# Altium PCB Verison_1.1.PcbDoc
Units mm, origin at the board's own origin, x right, y up, seen from the top; angles counter-clockwise.
Board outline 65.29 x 40.57 mm, 2 copper layers (Top Layer, Bottom Layer); 94 components, 92 nets, 465 pads, 128 vias.
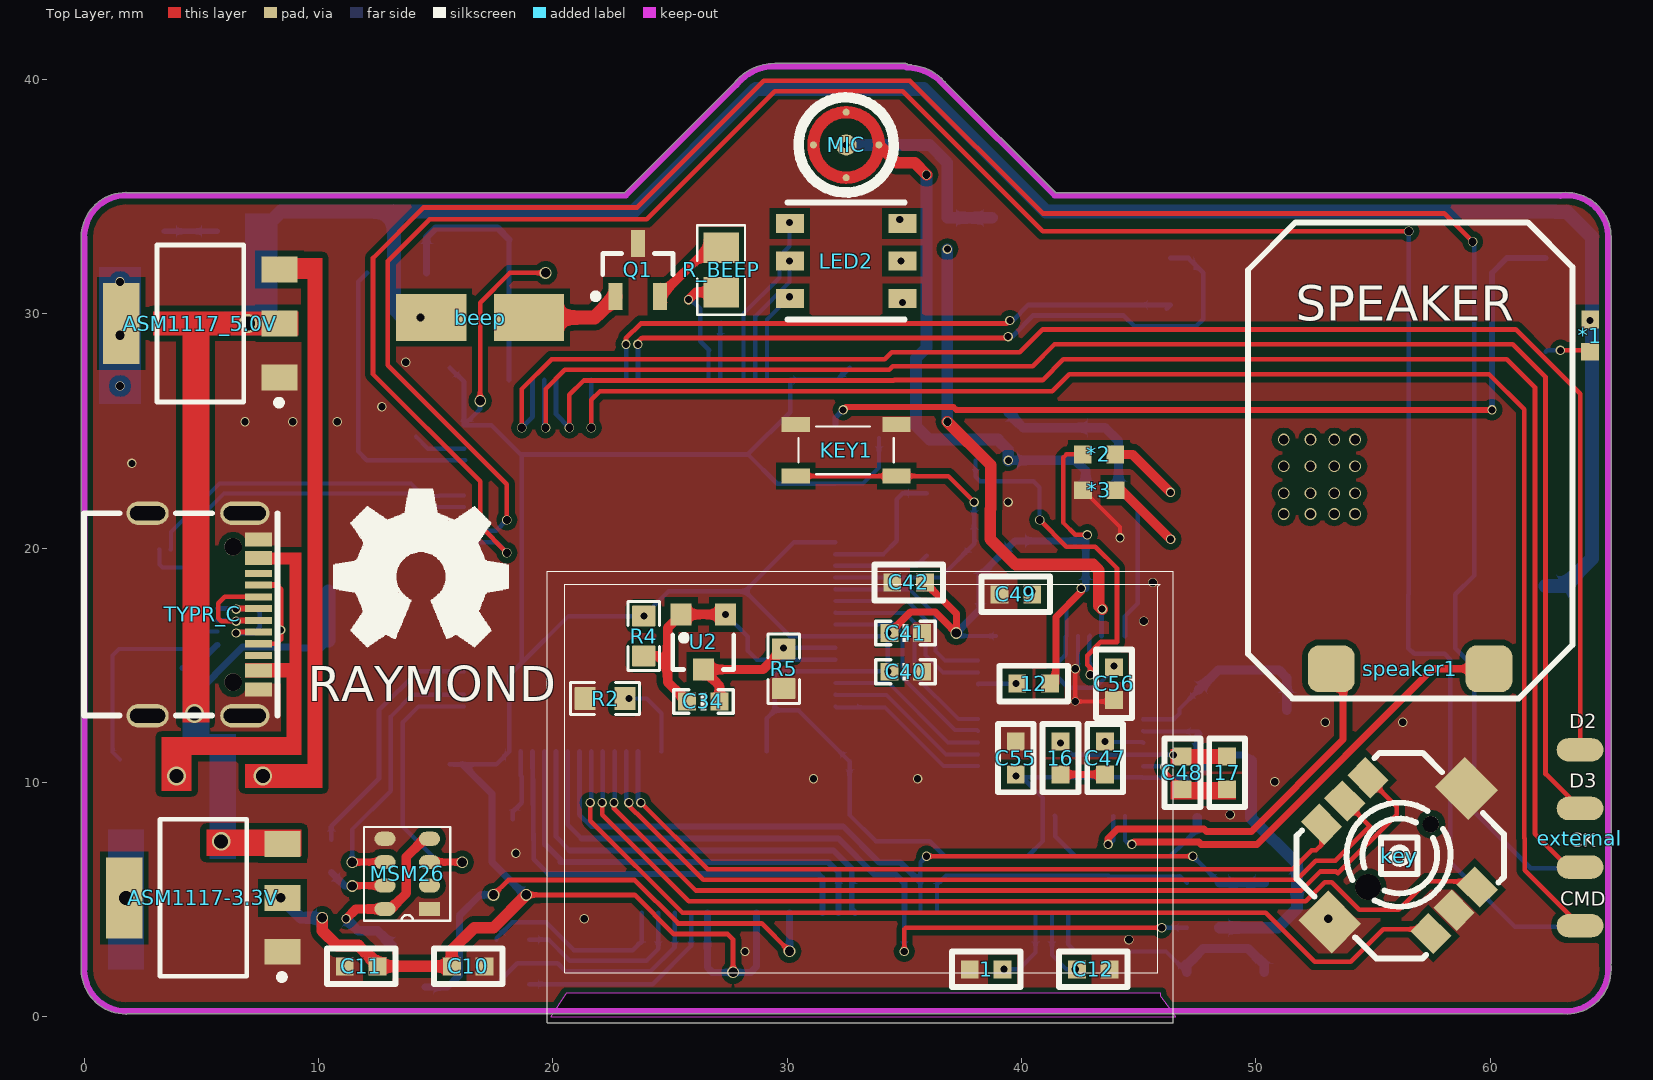
[diagram p0: Top Layer view]
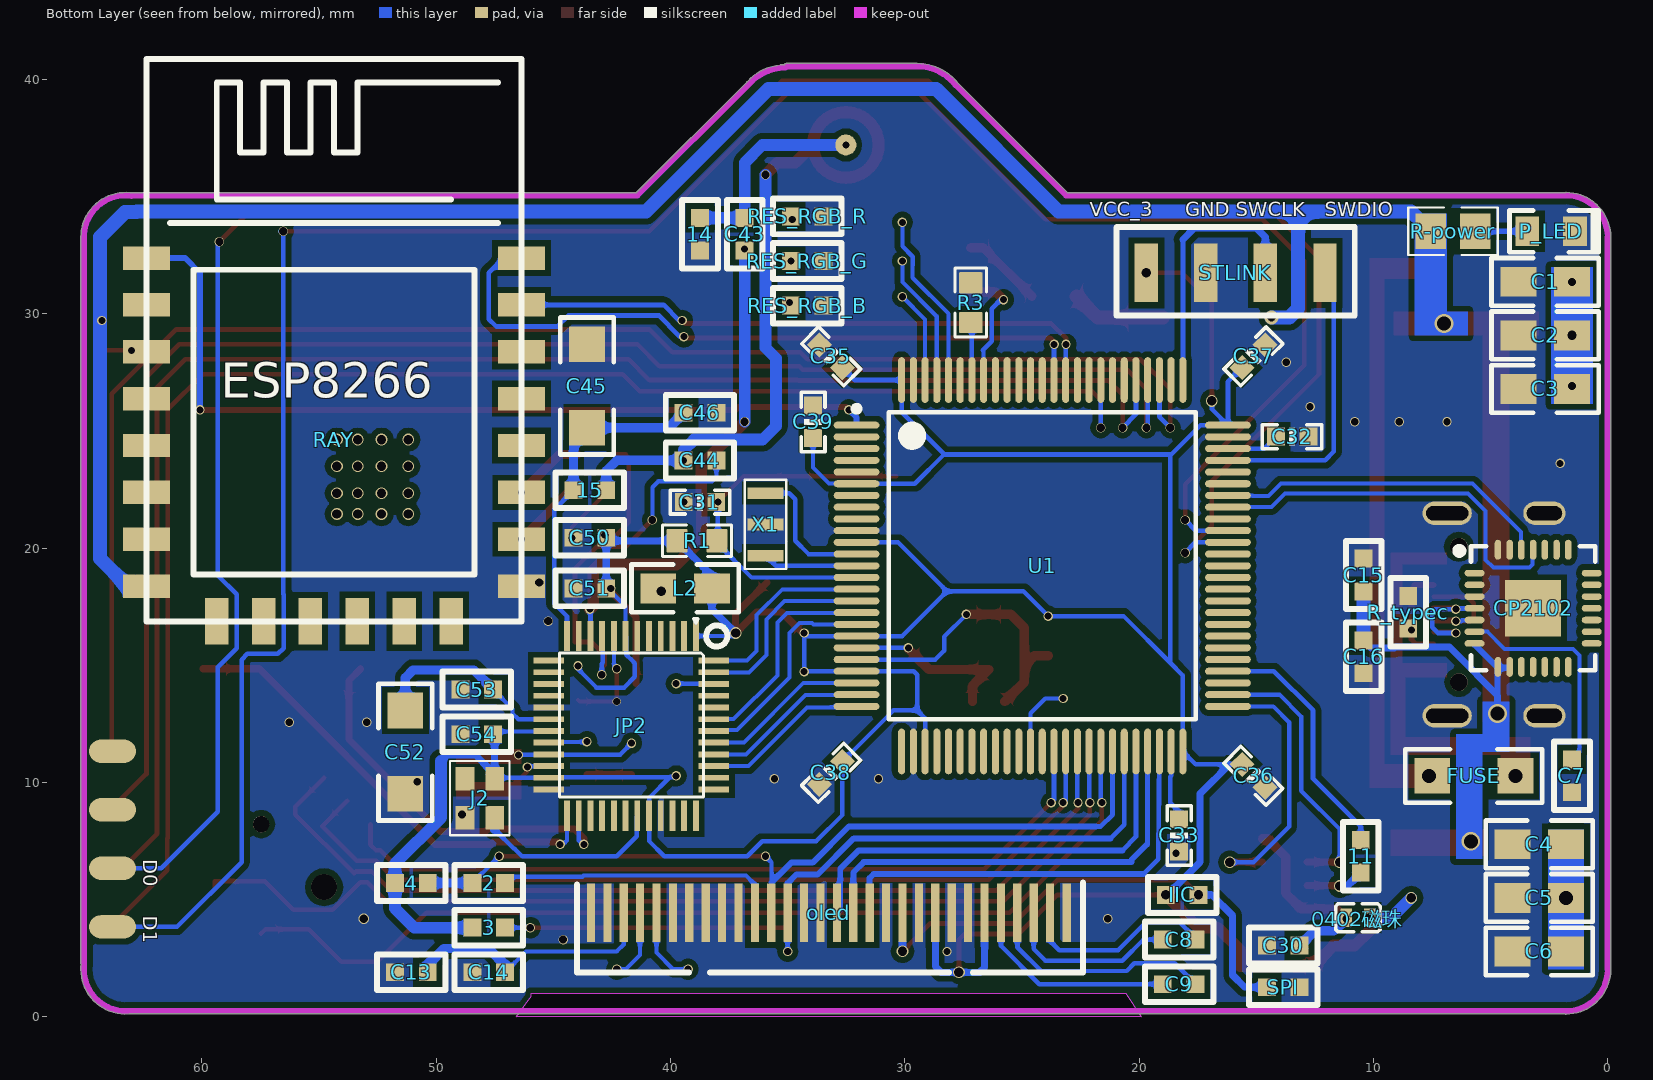
[diagram p1: Bottom Layer view, seen from below]

## Layer stack, top to bottom
Top Solder: solder mask 0.0102, Solder Resist, Dk 3.5
Top Layer: signal copper 0.0356
Dielectric 1: dielectric 0.32, FR-4, Dk 4.8
Bottom Layer: signal copper 0.0356
Bottom Solder: solder mask 0.0102, Solder Resist, Dk 3.5

## Board outline
-0.132,2.032 cw(c-0.005,2.032) -0.127,2.066 -0.127,33.24 cw(c-0.005,33.274) -0.132,33.274 cw(c1.778,33.274) 1.778,35.184 cw(c1.778,35.057) 1.812,35.179 23.061,35.179 27.717,39.835 cw(c29.464,38.481) 29.464,40.691 35.032,40.691 cw(c35.032,40.564) 35.138,40.635 cw(c35.088,38.425) 36.732,39.902 41.455,35.179 62.994,35.179 cw(c62.994,35.052) 63.036,35.172 cw(c63.246,33.274) 65.156,33.274 cw(c63.246,33.274) 65.151,33.143 65.151,2.284 cw(c65.024,2.284) 65.144,2.242 cw(c63.246,2.032) 65.156,2.032 cw(c63.246,2.032) 63.115,0.127 1.812,0.127 cw(c1.778,0.249) 1.778,0.122 cw(c1.778,2.032)

## Design rules (kind name [scope] priority, off if disabled: settings)
Clearance [All] p1: gap=0.254
PlaneConnect [All] p1: planeconnectstyle=Direct reliefexpansion=0.508 reliefentries=4 reliefconductorwidth=0.254 reliefairgap=0.254
PolygonConnect [All] p1: connectstyle=Direct reliefconductorwidth=0.254 reliefentries=4 polygonreliefangle="90 Angle" airgapwidth=0.254
RoutingVias [All] p1: holewidth=0.711 width=1.27 viastyle="Through Hole" minholewidth=0.711 minwidth=1.27 maxholewidth=0.711 maxwidth=1.27
SolderMaskExpansion [All] p1: expansion=0.102
Width [All] p1: maxlimit=2 minlimit=0.17 preferedwidth=0.18 minimp=50.000000 maximp=50.000000 favimp=50.000000
29 further rules are at their usual default settings.

## Components (designator, comment, footprint, x,y, rotation, side; value= is the part's Value field where it differs from the comment)
1 "电阻0603" 0603#1 38.481,2.032 r180 top
2 "电阻0603" 0603#1 47.752,5.715 r0 bottom
3 "电阻0603" 0603#1 47.752,3.81 r0 bottom
4 "电阻0603" 0603#1 51.054,5.715 r0 bottom
11 "电阻0603" 0603#1 10.541,6.858 r270 bottom
12 "电阻0603" 0603#1 40.513,14.224 r180 top
14 "电阻0603" 0603#1 38.735,33.401 r90 bottom
15 "电阻0603" 0603#1 43.434,22.479 r0 bottom
16 "电阻0603" 0603#1 41.656,11.049 r270 top
17 "电阻0603" 0603#1 48.768,10.414 r270 top
0402磁珠 "0402磁珠" 0402磁珠 10.668,4.191 r180 bottom
*1 "RES-0603" 0603#2 64.262,29.083 r270 top
*2 "RES-0603" 0603#2 43.307,24.003 r180 top
*3 "RES-0603" 0603#2 43.307,22.479 r0 top
ASM1117-3.3V "ASM1117-3.3V" SOT-223 5.08,5.08 r90 top locked
ASM1117_5.0V "ASM1117-5.0V" SOT-223 4.953,29.591 r90 top locked
beep "蜂鸣器" 两脚蜂鸣器 16.891,29.845 r0 top
C1 "Cap" 0805 1.524,31.369 r0 bottom locked
C2 "Cap" 0805 1.524,29.083 r0 bottom
C3 "Cap" 0805 1.524,26.797 r0 bottom locked
C4 "Cap" 0805 1.778,7.366 r0 bottom
C5 "Cap" 0805 1.778,5.08 r0 bottom
C6 "Cap" 0805 1.778,2.794 r0 bottom
C7 "104" 0603#1 1.524,10.287 r90 bottom
C8 "104" 0603#1 18.288,3.302 r0 bottom
C9 "104" 0603#1 18.288,1.397 r0 bottom
C10 "104" 0603#1 16.383,2.159 r0 top
C11 "104" 0603#1 11.811,2.159 r180 top
C12 "2.2uf" 0603#1 43.053,2.032 r0 top
C13 "2.2uf" 0603#1 51.054,1.905 r0 bottom
C14 "1uf" 0603#1 47.752,1.905 r0 bottom
C15 "1uf" 0603#1 10.414,18.86 r90 bottom
C16 "0.1uf" 0603#1 10.414,15.367 r270 bottom
C30 "100nf" 0603#1 13.843,3.048 r0 bottom locked
C31 "CAP_22" 0603_C 38.735,21.971 r180 bottom
C32 "Cap" 0603_C 13.462,24.765 r180 bottom
C33 "Cap" 0603_C 18.288,7.747 r90 bottom
C34 "Cap" 0603_C 26.416,13.462 r180 top
C35 "104" 0603_C 33.147,28.194 r45 bottom
C36 "104" 0603_C 15.113,10.287 r225 bottom
C37 "104" 0603_C 15.113,28.194 r135 bottom
C38 "104" 0603_C 33.147,10.414 r315 bottom
C39 "104" 0603_C 33.909,25.4 r90 bottom
C40 "104" 0603_C 35.052,14.732 r0 top
C41 "104" 0603_C 35.052,16.383 r0 top
C42 "104" 0603#1 35.179,18.542 r0 top
C43 "103" 0603#1 36.83,33.401 r270 bottom
C44 "103" 0603#1 38.735,23.749 r180 bottom
C45 "10uf" 1206 43.561,26.924 r90 bottom
C46 "104" 0603#1 38.735,25.781 r180 bottom
C47 "0.1uf" 0603#1 43.561,11.049 r90 top
C48 "220pf" 0603#1 46.863,10.414 r270 top
C49 "103" 0603#1 39.751,18.034 r180 top
C50 "104" 0603#1 43.434,20.447 r0 bottom
C51 "104" 0603#1 43.434,18.288 r0 bottom
C52 "10UF" 1206 51.308,11.303 r270 bottom locked
C53 "104" 0603#1 48.26,13.97 r0 bottom
C54 "104" 0603#1 48.26,12.065 r180 bottom
C55 "104" 0603#1 39.751,11.049 r270 top
C56 "104" 0603#1 43.942,14.224 r90 top
CP2102 "CP2102" CP2102 3.183,17.439 r180 bottom
external "双层边缘外接贴片" 外接贴片接口(无外框) 63.5,7.62 r90 top locked
FUSE "500MA" 1206 5.715,10.287 r0 bottom
IIC "电阻0603" 0603#1 18.161,5.207 r180 bottom
J2 "oscillator" J有源晶振-正方 58.293,8.382 r270 bottom
JP2 "LD3320" QFN48 38.91,15.977 r270 bottom locked
key "五向按键" 五向按键 56.134,6.985 r315 top locked
KEY1 "按键" 四角按键 32.512,24.182 r0 top
L2 "47uh" 0805 38.227,18.288 r0 bottom
LED2 "3LED" 三色LED 32.512,32.258 r0 top
MIC "MIC" 贴片MIC头 32.512,37.211 r0 top (schematic designator mic)
MSM26 "MSM261S4030H0" "MSM261S4030H0 - duplicate" 14.732,4.604 r180 top
oled "OLED_plast" oled_plast 32.512,10.541 r180 bottom locked
P_LED "LED0" 0805LED 2.413,33.528 r180 bottom
Q1 "QNPN" SOT-23B_N 23.622,31.877 r90 top
R1 "RES_10K" 0603_R 38.862,20.32 r0 bottom
R2 "Res2" 0603_R 22.225,13.589 r0 top
R3 "Res2" 0603_R 27.178,30.48 r90 bottom
R4 "Res2" 0603_R 23.876,16.256 r270 top
R5 "Res2" 0603_R 29.845,14.859 r90 top
R-power "Res1" 0805-1 6.604,33.528 r180 bottom
R_BEEP "Res1" 0805-1 27.178,31.877 r270 top
R_typec "电阻0603" 0603#1 8.509,17.272 r90 bottom
RAY "ESP8266" esp8266 54.34,28.711 r180 bottom locked
RES_RGB_B "电阻0603" 0603#1 34.163,30.353 r0 bottom
RES_RGB_G "电阻0603" 0603#1 34.163,32.258 r0 bottom
RES_RGB_R "电阻0603" 0603#1 34.163,34.163 r0 bottom
speaker1 "20*13mm  喇叭" "20*13mm 喇叭" 49.657,13.589 r0 top locked
SPI "电阻0603" 0603#1 13.843,1.27 r180 bottom
STLINK "贴片蓝牙" 贴片蓝牙 15.875,31.75 r180 bottom
TYPR_C "type-c" type-c 4.046,17.303 r270 top locked
U1 "STM32_F407" LQFP_100 24.13,19.304 r180 bottom locked
U2 "TL431A" SOT_23 26.416,16.002 r180 top
X1 "XTAL_SMT" XTAL_SMD 35.941,21.018 r90 bottom

## Footprints (in the part's own frame and the unit in brackets; to place one, negate y for a bottom-side part, rotate by r counter-clockwise, add the part's x,y. Pads: shape width x height; smd on the part's side, far side on the other; paste and mask are expansions set on the pad)
"20*13mm 喇叭" [mm]
  rrect50% 2x2 smd: 1(3.556,1.27) 2(10.287,1.27)
  silkscreen extent 0,0 13.84,20.32
0402磁珠 [mm]
  rect 0.5x0.8 smd: 1(-0.491,0.04) 2(0.509,0.04)
  silkscreen extent -0.94,-0.56 0.96,0.64
0603#1 [mil]
  rect 30x30 smd: 1(-27.5,0) 2(27.5,0)
  silkscreen extent -58,-30 58,30
0603#2 [mil]
  rect 30x30 smd: 1(-27,0) 2(27.5,-0.06)
0603_C [mil]
  rect 30x30 smd: 1(-27.25,0.03) 2(27.25,-0.03)
  silkscreen extent -50,-20 50,20, body extent -33,-18 33,18, height 35
0603_R [mm]
  rrect10% 0.9x1 smd: 1(-0.85,0) 2(0.85,0)
  silkscreen extent -1.47,-0.67 1.47,0.67, body extent -0.85,-0.38 0.85,0.42, height 0.56
0805 [mil]
  rect 60x50 smd: 1(0,0) 2(90,0)
  silkscreen extent -45,-40 135,40
0805-1 [mm]
  rect 1.3x1.5 smd: 1(-0.95,0) 2(0.95,0)
  silkscreen extent -1.9,-1.02 1.91,1.02, body extent -1,-0.62 1,0.63, height 0.5
0805LED [mil]
  rect 40x50 smd: 1(-40,0) 2(40,0)
  silkscreen extent -70,-35 80,35
1206 [mil]
  rect 60x60 smd: 1(-70,0) 2(70,0)
  silkscreen extent -115,-45 115,45, body extent -75,-35 75,35, height 39
CP2102 [mm]
  oval 0.85x0.28 smd: 1(-2.5,1.501) 2(-2.5,1.001) 3(-2.5,0.5) 4(-2.5,0) 5(-2.5,-0.5) 6(-2.5,-1.001) 7(-2.5,-1.501) 15(2.5,-1.501) 16(2.5,-1.001) 17(2.5,-0.5) 18(2.5,0) 19(2.5,0.5) 20(2.5,1.001) 21(2.5,1.501)
  oval 0.28x0.85 smd: 8(-1.501,-2.5) 9(-1.001,-2.5) 10(-0.5,-2.5) 11(0,-2.5) 12(0.5,-2.5) 13(1.001,-2.5) 14(1.501,-2.5) 22(1.501,2.5) 23(1.001,2.5) 24(0.5,2.5) 25(0,2.5) 26(-0.5,2.5) 27(-1.001,2.5) 28(-1.501,2.5)
  rect 2.4x2.4 smd: 29(0,0)
  silkscreen extent -3.3,-2.65 2.65,2.65
esp8266 [mm]
  rect 2x1 smd: 1(-8.017,3.674) 2(-8.017,1.674) 3(-8.017,-0.326) 4(-8.017,-2.326) 5(-8.017,-4.326) 6(-8.017,-6.326) 7(-8.017,-8.326) 8(-8.016,-10.326) 9(7.983,-10.326) 10(7.985,-8.326) 11(7.986,-6.326) 12(7.985,-4.326) 13(7.984,-2.326) 14(7.985,-0.326) 15(7.985,1.674) 16(7.985,3.674)
  rect 1x2 smd: 17(-5.015,-11.827) 18(-3.017,-11.826) 19(-1.019,-11.826) 20(0.982,-11.826) 21(2.981,-11.826) 22(4.981,-11.827)
  silkscreen extent -8.02,-11.83 7.98,12.17
J有源晶振-正方 [mm]
  rect 1x0.8 smd: 1(-1.778,9.525) 2(-0.127,9.525) 3(-0.127,10.795) 4(-1.778,10.795)
  silkscreen extent -2.54,8.89 0.64,11.43
LQFP_100 [mm]
  oval 1.95x0.3 smd: 1(-7.925,5.949) 2(-7.925,5.449) 3(-7.925,4.949) 4(-7.925,4.449) 5(-7.925,3.949) 6(-7.925,3.449) 7(-7.925,2.949) 8(-7.925,2.449) 9(-7.925,1.949) 10(-7.925,1.449) 11(-7.925,0.949) 12(-7.925,0.449) 13(-7.925,-0.051) 14(-7.925,-0.551) 15(-7.925,-1.051) 16(-7.925,-1.551) 17(-7.925,-2.051) 18(-7.925,-2.551) 19(-7.925,-3.051) 20(-7.925,-3.551) 21(-7.925,-4.051) 22(-7.925,-4.551) 23(-7.925,-5.051) 24(-7.925,-5.551) 25(-7.925,-6.051) 51(7.925,-6.051) 52(7.925,-5.551) 53(7.925,-5.051) 54(7.925,-4.551) 55(7.925,-4.051) 56(7.925,-3.551) 57(7.925,-3.051) 58(7.925,-2.551) 59(7.925,-2.051) 60(7.925,-1.551) 61(7.925,-1.051) 62(7.925,-0.551) 63(7.925,-0.051) 64(7.925,0.449) 65(7.925,0.949) 66(7.925,1.449) 67(7.925,1.949) 68(7.925,2.449) 69(7.925,2.949) 70(7.925,3.449) 71(7.925,3.949) 72(7.925,4.449) 73(7.925,4.949) 74(7.925,5.449) 75(7.925,5.949)
  oval 0.3x1.95 smd: 26(-6,-7.976) 27(-5.5,-7.976) 28(-5,-7.976) 29(-4.5,-7.976) 30(-4,-7.976) 31(-3.5,-7.976) 32(-3,-7.976) 33(-2.5,-7.976) 34(-2,-7.976) 35(-1.5,-7.976) 36(-1,-7.976) 37(-0.5,-7.976) 38(0,-7.976) 39(0.5,-7.976) 40(1,-7.976) 41(1.5,-7.976) 42(2,-7.976) 43(2.5,-7.976) 44(3,-7.976) 45(3.5,-7.976) 46(4,-7.976) 47(4.5,-7.976) 48(5,-7.976) 49(5.5,-7.976) 50(6,-7.976) 76(6,7.874) 77(5.5,7.874) 78(5,7.874) 79(4.5,7.874) 80(4,7.874) 81(3.5,7.874) 82(3,7.874) 83(2.5,7.874) 84(2,7.874) 85(1.5,7.874) 86(1,7.874) 87(0.5,7.874) 88(0,7.874) 89(-0.5,7.874) 90(-1,7.874) 91(-1.5,7.874) 92(-2,7.874) 93(-2.5,7.874) 94(-3,7.874) 95(-3.5,7.874) 96(-4,7.874) 97(-4.5,7.874) 98(-5,7.874) 99(-5.5,7.874) 100(-6,7.874)
  silkscreen extent -8.05,-6.6 6.55,6.77, body extent -8,-8 8,8, height 1.6
"MSM261S4030H0 - duplicate" [mm]
  rect 0.9x0.6 smd: 1(0,0)
  oval 0.9x0.6 smd: 2(0,-1) 3(0,-2) 4(0,-3) 5(1.9,-3) 6(1.9,-2) 7(1.9,-1) 8(1.9,0)
  silkscreen extent -0.89,-3.5 2.79,0.5
oled_plast [mil]
  rect 13.8x98.4 smd: 1(371.03,-239.92) 2(343.27,-240) 3(315.71,-240) 4(288.15,-240) 5(260.59,-240) 6(233.03,-240) 7(205.47,-240) 8(177.92,-240) 9(150.36,-240) 10(122.8,-240) 11(95.24,-240) 12(67.68,-240) 13(40.12,-240) 14(12.56,-240) 15(-15,-240) 16(-42.56,-240) 17(-70.12,-240) 18(-97.67,-240) 19(-125.23,-240) 20(-152.79,-240) 21(-180.35,-240) 22(-207.91,-240) 23(-235.47,-240) 24(-263.03,-240) 25(-290.59,-240) 26(-318.15,-240) 27(-345.71,-240) 28(-373.07,-240.06) 29(-400.59,-240.1) 30(-428.11,-240.1)
  Keep-Out Layer board cut-out: 496.46,-415.01 -25,-415.01 -553.54,-415.01 -528.54,-380 -528.54,-375 -513.53,-375 -25,-375 470,-374.95
  silkscreen extent -452,-340 399,-189
QFN48 [mm]
  rect 1.3x0.25 smd: 1(-0.279,0) 2(-0.279,-0.5) 3(-0.279,-1) 4(-0.279,-1.5) 5(-0.279,-2) 6(-0.279,-2.5) 7(-0.279,-3) 8(-0.279,-3.5) 9(-0.279,-4) 10(-0.279,-4.5) 11(-0.279,-5) 12(-0.279,-5.5) 25(7.396,-5.5) 26(7.396,-5) 27(7.396,-4.5) 28(7.396,-4) 29(7.396,-3.5) 30(7.396,-3) 31(7.396,-2.5) 32(7.396,-2) 33(7.396,-1.5) 34(7.396,-1) 35(7.396,-0.5) 36(7.396,0)
  rect 0.25x1.3 smd: 13(0.77,-6.27) 14(1.27,-6.27) 15(1.77,-6.27) 16(2.27,-6.27) 17(2.77,-6.27) 18(3.27,-6.27) 19(3.77,-6.27) 20(4.27,-6.27) 21(4.77,-6.27) 22(5.27,-6.27) 23(5.77,-6.27) 24(6.27,-6.27) 37(6.27,0.77) 38(5.77,0.77) 39(5.27,0.77) 40(4.77,0.77) 41(4.27,0.77) 42(3.77,0.77) 43(3.27,0.77) 44(2.77,0.77) 45(2.27,0.77) 46(1.77,0.77) 47(1.27,0.77) 48(0.77,0.77)
  silkscreen extent -1.03,-5.82 6.59,1.34
SOT-23B_N [mm] "SOT23, 3-Leads, Body 2.9x1.3mm, Pitch 0.95mm, Lead Span 2.4mm, IPC Medium Density"
  rect 1.15x0.6 smd: 1(-1.125,0.95) 2(-1.125,-0.95) 3(1.125,0)
  silkscreen extent -1.25,-1.5 0.7,1.92, body extent -0.7,-1.5 0.7,1.5, height 1.14
SOT-223 [mm]
  rect 1.1x1.55 smd: 1(-2.3,-3.375) 2(0,-3.375) 3(2.3,-3.375)
  rect 3.45x1.55 smd: 4(0,3.375)
  silkscreen extent -3.5,-3.48 3.35,1.85, body extent -3.3,-3.94 3.3,3.43, height 0.8
SOT_23 [mm]
  rect 0.9x0.95 smd: 1(0.95,-1.175) 2(-0.95,-1.175) 3(0,1.175)
  silkscreen extent -1.3,-0.3 1.3,1.18, body extent -1.5,-1.33 1.5,1.18, height 1.12
type-c [mm]
  oval 1x2.1 hole 0.61 slot 1.8 at 90 deg: 1(-4.193,2.803) 2(4.447,2.803)
  oval 1x1.8 hole 0.61 slot 1.5 at 90 deg: 3(-4.193,-1.346) 4(4.447,-1.346)
  rect 0.6x1.15 smd: A1B12(-3.073,3.379) A4B9(-2.273,3.379) B1A12(3.327,3.379) B4A9(2.527,3.379)
  rect 0.3x1.15 smd: A5(-1.123,3.379) A6(-0.123,3.379) A7(0.377,3.379) A8(-1.623,3.379) B5(1.877,3.379) B6(0.877,3.379) B7(-0.623,3.379) B8(1.377,3.379)
  round 0.75 hole 0.75 unplated: ""(-2.763,2.304) ""(3.017,2.304)
  silkscreen extent -4.19,-4.06 4.45,4.19
XTAL_SMD [mil]
  rect 19.68x60 smd: 0(0,0) 1(-52.5,0) 2(52.5,0)
  silkscreen extent -75,-35 75,35, body extent -81,-30 81,29, height 35
三色LED [mm]
  rect 1.2x0.8 smd: 1(-2.4,1.6) 2(-2.4,0) 3(-2.4,-1.6) 4(2.4,1.6) 5(2.4,0) 6(2.4,-1.6)
  silkscreen extent -2.5,-2.5 2.5,2.5
两脚蜂鸣器 [mm]
  rect 3x2 smd: 0(-2.083,0) 1(2.083,0)
五向按键 [mm]
  rect 1.4x1.1 smd: 1(-3.237,1.32) 2(-3.237,-0.08) 3(-3.237,-1.48) 4(3.363,1.32) 5(3.363,-0.08) 6(3.363,-1.48)
  rect 2x1.8 smd: 7(0.063,3.97) 8(-0.037,-4.18)
  round 0.7 hole 0.7 unplated: ""(0.063,1.82)
  round 1.1 hole 1.1 unplated: ""(0.063,-1.98)
  silkscreen extent -3.64,-3.88 3.86,3.72
四角按键 [mm]
  rect 1.2x0.65 smd: 1(-2.15,1.1) 1(2.15,1.1) 2(-2.15,-1.1) 2(2.15,-1.1)
  silkscreen extent -2.03,-1.02 2.03,1.02
外接贴片接口(无外框) [mm]
  oval 1x2 smd: 1(-3.723,-0.331) 2(-1.223,-0.331) 3(1.277,-0.331) 4(3.777,-0.331)
  oval 1x2 smd far side: 5(3.723,-0.304) 6(1.223,-0.304) 7(-1.277,-0.304) 8(-3.777,-0.304)
贴片MIC头 [mm]
  round 0.9 hole 0.3: 1(0,0)
  round 0.3 smd: 2(-1.397,0) 2(0,-1.397) 2(0,1.397) 2(1.397,0)
  round 0 smd: 2(0,-1.397) 2(0,1.397)
  Top Layer region: 232 vertices and 0 holes, not listed, extent -1.647,-1.647 1.647,0.25
  Top Layer region: 232 vertices and 0 holes, not listed, extent -1.647,-0.25 1.647,1.647
  silkscreen extent -2.03,-2.03 2.03,2.03
贴片蓝牙 [mm]
  rect 1x2.5 smd: 1(-3.81,0) 2(-1.27,0) 3(1.27,0) 4(3.81,0)
  silkscreen extent -5.08,-1.82 5.08,1.97

## Part data
ASM1117-3.3V ASM1117_5.0V: library part ASM1117, "3.3V稳压芯片"
C1 C2 C3 C4 C5 C6: "无极性电容"
C7 C8 C9 C10 C11 C12 C13 C14 C15 C16 C30 C42 C43 C44 C46 C47 C48 C49 C50 C51 C53 C54 C55 C56: library part 电容0603
C32 C33 C34: "Capacitor"
C35 C36 C37 C38 C39 C40 C41: library part CAP, "Capacitor"
C45 C52: library part "Cap Pol2", "电解电容"
FUSE: library part Fuse, "Fuse"
J2: library part "J晶振 有源"
L2: library part L
LED2: library part 三色LED
P_LED: "发光二极管"
Q1: "NPN Bipolar Transistor"
R2 R3 R4 R5: "Resistor"
R-power R_BEEP: "贴片电阻"
RAY: library part esp8266
U1: library part STM32_F40X

## Via types
v1: diameter 0.4, hole 0.3, Top Layer to Bottom Layer, 50 vias
v2: diameter 0.5, hole 0.4, Top Layer to Bottom Layer, 30 vias
v3: diameter 0.4, hole 0.31, Top Layer to Bottom Layer, 21 vias
v4: diameter 0.4, hole 0.35, Top Layer to Bottom Layer, 16 vias
v5: diameter 0.8, hole 0.6, Top Layer to Bottom Layer, 6 vias
v6: diameter 0.4, hole 0.32, Top Layer to Bottom Layer, 1 vias
v7: diameter 0.45, hole 0.35, Top Layer to Bottom Layer, 1 vias
v8: diameter 0.35, hole 0.31, Top Layer to Bottom Layer, 1 vias
v9: diameter 0.6, hole 0.342, Top Layer to Bottom Layer, 1 vias
v10: diameter 0.4, hole 0.33, Top Layer to Bottom Layer, 1 vias

## Nets (pads, with @x,y where several pads share a name; then routed paths per layer and width w, separated by ;. In a path a pad name is that pad's centre, name@x,y a point inside that pad or via, vN(x,y) a via of type N, cw(c..) or ccw(c..) an arc to the next point about the centre after c; other vN are vias at no path point)
5V: *1.1 ASM1117-3.3V.3 ASM1117_5.0V.2 beep.0 C15.1 C16.1 CP2102.7 CP2102.8 CP2102.9 R-power.1 RAY.8 | length 97
  Bottom Layer w0.254: CP2102.9@4.196,14.899 CP2102.8@4.676,14.899 ; 4.699,13.716 4.699,14.876 CP2102.8@4.676,14.899 ; CP2102.7@5.675,15.877 4.697,14.899 CP2102.8@4.676,14.899 ; R-power.1@6.985,32.959 R-power.1
  Bottom Layer w0.3: v5(4.699,12.954) 4.699,13.716 5.571,14.588 5.571,14.609 6.751,15.789 9.057,15.789 9.098,15.748 10.096,15.748 C16.1
  Bottom Layer w0.6: R-power.1 8.397,34.371 13.208,34.371 ; C16.1 C15.1 ; v9(14.351,29.845) 13.589,29.845 13.208,30.226 13.208,34.371 ; RAY.8 63.17,18.385 64.343,19.558 64.343,32.916 64.338,32.921 64.338,33.274 63.271,34.341 62.784,34.341 62.754,34.371 41.039,34.371 35.815,39.595 28.655,39.595 23.431,34.371 13.208,34.371
  other v1: 64.262,29.718
  other v5: 5.842,7.493 6.985,29.591
AGND: C34.1 R5.2 U1.20 U2.3 | length 7.7
  Top Layer w0.4: C34.1 27.108,14.135 U2.3 28.963,14.827 R5.2
  Bottom Layer w0.19: v1(29.845,15.752) U1.20 U1.20
BEEP: R_BEEP.2 U1.93 | length 5.4
  Top Layer w0.4: v1(25.781,30.607) 26.101,30.927 R_BEEP.2
  Bottom Layer w0.18: U1.93 26.636,27.184 26.636,28.414 26.67,28.448
  Bottom Layer w0.2: v1(25.781,30.607) 25.908,30.607 26.289,30.226 26.289,28.829 26.67,28.448
BOOT0: R3.1 U1.94 | length 2.5
  Bottom Layer w0.19: U1.94 U1.94 27.13,29.582 R3.1
BOOT1: R2.2 U1.37 | length 3.3
  Bottom Layer w0.19: v1(23.241,13.589) 24.003,13.589 24.631,12.961 U1.37 U1.37
CC1: R_typec.1 TYPR_C.A5 TYPR_C.B8 | length 4.2
  Top Layer w0.2: TYPR_C.B8 8.189,15.926 8.381,16.118
  Top Layer w0.254: TYPR_C.A5 8.244,18.426 8.244,18.371 8.381,18.234 v1(8.381,16.51) 8.381,16.118
D+: CP2102.4 TYPR_C.A6 TYPR_C.B6 | length 5.6
  Top Layer w0.2: v1(6.477,16.383) 6.52,16.426 TYPR_C.B6
  Top Layer w0.254: v1(6.477,17.399) 6.504,17.426 TYPR_C.A6
  Bottom Layer w0.2: CP2102.4 5.689,17.433 6.443,17.433 v1(6.477,17.399) 7.366,17.399 7.493,17.272 7.493,16.637 7.239,16.383 v1(6.477,16.383)
D-: CP2102.5 TYPR_C.A7 TYPR_C.B7 | length 5.1
  Top Layer w0.2: v1(6.477,16.891) 5.842,16.891 5.715,17.018 5.715,17.653 5.988,17.926 TYPR_C.B7
  Top Layer w0.254: v1(6.477,16.891) 6.512,16.926 TYPR_C.A7
  Bottom Layer w0.2: CP2102.5 5.689,16.932 6.213,16.932 6.255,16.891 v1(6.477,16.891)
  Bottom Layer w0.254: v1@6.469,16.899 v1(6.477,16.891)
ESP8266_REST: RAY.1 U1.1 | length 36.9
  Top Layer w0.25: v1(32.385,25.908) 32.506,26.029 37.091,26.029 37.212,25.908 v1(60.071,25.908)
  Bottom Layer w0.25: U1.1@32.055,25.282 32.055,25.578 v1(32.385,25.908) ; v1(60.071,25.908) 60.071,31.75 60.706,32.385 RAY.1
GND: 1.2 14.1 *3.1 ASM1117-3.3V.1 ASM1117_5.0V.1 C1.2 C2.2 C3.2 C4.2 C5.2 C6.2 C7.1 C10.2 C11.2 C12.2 C13.2 C14.2 C15.2 C16.2 C30.2 C31.1 C32.2 C33.1 C35.2 C36.2 C37.2 C38.2 C39.2 C40.2 C41.2 C42.1 C45.2 C46.2 C49.2 C50.2 C51.2 C52.2 C53.2 C54.1 C55.1 C56.1 CP2102.3 J2.2 JP2.8 JP2.17 JP2.24 JP2.33 KEY1.1 key.5 key.7 key.8 MSM26.1 MSM26.5 oled.1 oled.7 oled.8 oled.10 oled.12 oled.16 oled.17 oled.21 oled.22 oled.23 oled.24 oled.25 oled.29 oled.30 P_LED.2 Q1.3 R2.1 R3.2 R5.1 R_typec.2 RAY.9 RES_RGB_B.1 RES_RGB_G.1 RES_RGB_R.1 SPI.2 STLINK.2 TYPR_C.1 TYPR_C.2 TYPR_C.3 TYPR_C.4 TYPR_C.A1B12 TYPR_C.B1A12 U1.10 U1.27 U1.74 U1.99 X1.0 | length 7.2
  Top Layer w0.18: v3(42.291,14.859) v8(42.291,13.462) 43.878,13.462 C56.1 ; *3.1 44.196,20.904 v1(44.196,20.447)
  Bottom Layer w0.18: v3(42.291,14.859) 42.41,14.978 JP2.8
  other v1: 18.415,6.985 39.427,21.972
  other v3: 28.194,2.794 21.336,4.191 31.115,10.16 35.56,10.16 52.959,12.573 56.261,12.573 2.032,23.622 6.858,25.4 8.89,25.4 10.795,25.4 12.7,26.035 13.716,27.94
  other v4: 44.577,3.302 48.895,8.636 45.212,16.891 45.593,18.542
  other v6: 50.8,10.033
  other v7: 53.086,4.191
ICR_CLK: J2.3 JP2.31 | length 8.3
  Bottom Layer w0.19: JP2.31 41.436,8.555 41.436,7.713 42.291,6.858 43.76,6.858 46.327,6.858 46.639,7.17 46.667,7.17 47.498,8.001
  Bottom Layer w0.4: 47.498,8.001 J2.3
ICR_CS: JP2.43 U1.17 | length 9.3
  Bottom Layer w0.17: U1.17 32.066,17.242 35.026,17.242 35.433,16.835 35.433,14.57 37.296,12.707 JP2.43
ICR_INTB: JP2.48 U1.15 | length 8.2
  Bottom Layer w0.17: U1.15 32.066,18.242 35.225,18.242 36.322,17.145 36.322,15.621 36.736,15.207 JP2.48
ICR_MD: 12.2 JP2.46 | length 1.6
  Bottom Layer w0.19: JP2.46 38.157,14.224 v1(39.751,14.224)
ICR_MICN: C43.2 JP2.10 | length 21.2
  Top Layer w0.5: v4(36.83,25.4) 38.677,23.553 38.677,21.679 38.661,21.664 38.661,20.394 39.751,19.304 43.053,19.304 43.292,19.065 43.292,17.541 v1(43.434,17.399)
  Bottom Layer w0.2: JP2.10 43.41,17.375 v1(43.434,17.399)
  Bottom Layer w0.5: v4(36.83,25.4) C43.2 v1(36.83,32.766)
ICR_MICP: C44.2 JP2.9 | length 16.4
  Top Layer w0.2: v10(40.767,21.209) 41.91,20.066 43.145,20.066 44.069,19.142 44.069,16.002 43.378,16.002 42.799,15.423 42.799,15.021 42.926,14.894 v3(42.926,14.605)
  Bottom Layer w0.18: C44.2 38.036,23.05 38.227,22.86 40.513,22.86 40.767,22.606 v10(40.767,21.209)
  Bottom Layer w0.2: JP2.9 42.889,16.235 42.889,15.111 42.926,15.074 v3(42.926,14.605)
ICR_ON: JP2.25 speaker1.2 | length 19.8
  Top Layer w0.3: v1(44.704,7.366) 44.8,7.462 47.558,7.462 47.654,7.366 50.038,7.366 57.531,14.859 speaker1.2
  Bottom Layer w0.18: JP2.25 44.41,7.533 44.577,7.366 v1(44.704,7.366)
ICR_OP: JP2.26 speaker1.1 | length 16.7
  Top Layer w0.3: v1(43.688,7.366) 43.688,7.62 44.084,8.016 47.787,8.016 47.883,7.92 49.809,7.92 53.721,11.832 53.721,14.351 speaker1.1
  Bottom Layer w0.18: v1(43.688,7.366) 43.751,7.366 43.91,7.525 JP2.26
ICR_RSTB: JP2.47 U1.16 | length 8.2
  Bottom Layer w0.17: U1.16 32.066,17.742 35.125,17.742 35.898,16.969 35.898,15.445 36.637,14.707 JP2.47
ICR_SCK: JP2.39 U1.25 | length 7.1
  Bottom Layer w0.17: U1.25 32.1,13.208 34.163,13.208 36.664,10.707 JP2.39
ICR_SI: JP2.41 U1.23 | length 7.1
  Bottom Layer w0.17: U1.23 32.066,14.242 34.328,14.242 36.864,11.707 JP2.41
ICR_SO: JP2.40 U1.24 | length 7.1
  Bottom Layer w0.17: U1.24 32.066,13.742 34.228,13.742 36.764,11.207 JP2.40
ICR_WRB: JP2.42 U1.18 | length 9.1
  Bottom Layer w0.17: U1.18 33.898,16.753 33.963,16.818 34.49,16.818 34.925,16.383 34.925,14.478 37.16,12.243 38.104,12.243 JP2.42
IRC_VCC3.3: 3.2 4.2 12.1 0402磁珠.2 *2.2 ASM1117-3.3V.2 C10.1 C11.1 C35.1 C36.1 C37.1 C38.1 C39.1 C40.1 C41.1 C42.2 C50.1 C51.1 C54.2 C55.2 C56.2 IIC.1 J2.4 JP2.1 JP2.7 JP2.19 JP2.23 JP2.32 L2.1 oled.6 oled.9 R1.2 R4.1 STLINK.1 U1.6 U1.11 U1.19 U1.22 U1.28 U1.50 U1.75 U1.100 | length 204.4
  Top Layer w0.19: v2(16.891,26.289) 16.891,30.48 18.161,31.75 v2(19.685,31.75) ; *2.2 41.912,24.005 41.783,23.876 41.783,21.082 42.291,20.574 v1(42.799,20.574)
  Top Layer w0.2: v2(18.86,5.207) 23.481,5.207 25.151,3.537 27.451,3.537 27.686,3.302 v2(27.686,1.905)
  Top Layer w0.3: C41.1 35.248,17.272 36.322,17.272 v2(37.211,16.383) 37.211,17.209 C42.2 ; 12.1@41.465,14.224 41.458,14.232 41.458,17.074 42.545,18.161 v3(42.545,18.288)
  Top Layer w0.5: v2(10.159,4.231) 10.159,3.684 10.795,3.048 11.698,3.048 12.509,2.237 C11.1 C10.1 15.684,2.857 16.637,3.81 17.462,3.81 v2(18.86,5.207)
  Bottom Layer w0.18: 28.321,24.003 29.571,22.753 U1.6 32.061,22.759 33.225,22.759 33.91,23.444 C39.1 ; v2(37.211,16.383) 37.338,16.256 JP2.1 ; JP2.32@40.894,8.597 JP2.32 ; JP2.7 41.91,17.526 42.545,18.161 v3(42.545,18.288) ; JP2.23 47.451,10.207 J2.4 ; JP2.19 45.211,12.176 47.561,12.176 C54.2
  Bottom Layer w0.19: C36.1 16.147,10.777 17.579,10.777 U1.50 18.13,14.574 18.669,15.113 ; v2(16.891,26.289) 16.891,25.943 16.205,25.257 16.21,25.252 17.377,25.252 18.627,24.003 18.669,23.961 18.669,15.113 ; U1.28 U1.28 29.131,12.748 29.464,13.081 ; U1.11 30.286,20.253 28.194,18.161 ; v1(39.751,10.287) 39.805,10.233 40.027,10.233 ; JP2.32@40.894,8.597 40.894,9.366 40.027,10.233 ; JP2.32 40.91,7.509 40.259,6.858 36.717,6.858 36.082,7.493 33.782,7.493 32.657,8.618 C38.1 30.479,13.081 29.464,13.081 ; JP2.7 41.884,16.23 41.884,15.461 41.68,15.257 41.673,15.257 41.513,15.097 41.513,14.515 41.972,14.056 43.153,14.056 43.942,14.845 v1(43.942,14.986) ; JP2.23 45.154,10.233 40.027,10.233 ; 18.669,15.113 20.662,17.106 v1(23.876,17.106) 24.931,18.161 28.194,18.161 ; 28.194,18.161 30.102,16.253 U1.19 U1.19 34.161,16.254 v1(34.29,16.383) v1(34.29,14.732) 34.27,14.752 U1.22 U1.22 29.612,14.753 29.464,14.605 29.464,13.081
  Bottom Layer w0.2: C37.1 16.205,27.103 U1.75@16.205,25.257 ; 18.627,24.003 28.321,24.003 30.13,25.812 U1.100 ; U1.100@30.134,27.178 32.132,27.178 C35.1
  Bottom Layer w0.3: 16.147,10.777 17.399,9.525 17.399,6.604 18.796,5.207 v2(18.86,5.207) ; oled.6 26.593,2.109 26.797,1.905 v2(27.686,1.905) 28.448,1.905 28.693,2.15 oled.9 ; v2(37.211,16.383) 38.227,17.399 L2.1 38.227,18.835 R1.2 42.608,20.32 C50.1 C51.1 ; J2.4 J2.4@47.498,10.361 ; C54.2 47.498,12.002 J2.4@47.498,10.361 ; 49.784,10.922 49.53,11.176 48.313,11.176 J2.4@47.498,10.361
  Bottom Layer w0.5: v2(8.382,5.08) 9.231,4.231 v2(10.159,4.231) ; 3.2 50.927,3.81 51.752,4.635 4.2 51.752,6.54 49.784,8.509 49.784,10.922
KEY1: key.1 U1.41 | length 40.8
  Top Layer w0.2: v1(22.606,9.144) 22.606,8.89 26.1,5.396 51.936,5.396 52.747,6.207 53.416,6.207 53.497,6.126 56.007,8.636 56.007,8.978 key.1
  Bottom Layer w0.2: v1(22.606,9.144) 22.63,9.168 U1.41
KEY2: key.2 U1.40 | length 37.6
  Top Layer w0.2: v1@23.241,9.017 23.295,8.963 23.295,8.956 23.561,8.69 23.568,8.69 26.408,5.85 51.748,5.85 52.559,6.661 53.39,6.661 54.86,8.132 54.86,8.145 key.2
  Bottom Layer w0.2: U1.40 23.13,9.255 v1(23.241,9.144)
KEY3: key.3 U1.39 | length 33.8
  Top Layer w0.2: v1(23.749,9.144) 23.756,9.144 26.596,6.304 51.56,6.304 52.371,7.115 52.562,7.115 52.798,7.351 key.3
  Bottom Layer w0.2: U1.39 23.63,9.263 v1(23.749,9.144)
KEY4: key.4 U1.42 | length 43.2
  Top Layer w0.2: v1(22.098,9.144) 22.098,8.636 25.792,4.942 52.124,4.942 52.935,5.753 53.228,5.753 54.409,4.572 56.084,4.572 57.3,5.788 59.445,5.788 key.4
  Bottom Layer w0.2: v1(22.098,9.144) 22.13,9.176 U1.42
KEY5: key.6 U1.43 | length 42
  Top Layer w0.2: v1(21.59,9.144) 21.59,8.382 25.527,4.445 50.419,4.445 52.506,2.358 54.047,2.358 55.438,3.749 57.277,3.749 key.6
  Bottom Layer w0.2: v1(21.59,9.144) 21.63,9.184 U1.43
MIC_3V3: 0402磁珠.1 C30.1 MSM26.4 MSM26.8 | length 8.3
  Top Layer w0.4: v1(11.176,4.191) 11.589,4.604 MSM26.8 13.068,4.604 13.736,5.272 13.736,6.824 14.516,7.604 MSM26.4
  Bottom Layer w0.4: v1(11.176,4.191) 11.684,3.683 12.509,3.683 C30.1
MIC_BCK: MSM26.6 U1.52 | length 11.8
  Top Layer w0.3: v2(11.43,6.604) MSM26.6
  Bottom Layer w0.18: v2(11.43,6.604) 11.43,8.001 13.081,9.652 13.081,12.827 14.007,13.753 U1.52
MIC_DAT3: 11.1 U1.54 | length 10.7
  Bottom Layer w0.18: 15.167,14.753 U1.54
  Bottom Layer w0.2: 11.1 10.541,8.128 12.573,10.16 12.573,13.081 14.245,14.753 15.167,14.753
MIC_WS: MSM26.3 U1.51 | length 11.9
  Top Layer w0.3: MSM26.3 v2(16.129,6.604)
  Bottom Layer w0.18: v2(16.129,6.604) 15.113,6.604 13.589,8.128 13.589,12.573 14.269,13.253 U1.51
Net1_1: 1.1 oled.26 | length 3.3
  Bottom Layer w0.18: v3(39.243,2.032) 39.878,2.032 40.593,2.747 oled.26
Net2_1: 2.1 oled.20 | length 12.2
  Bottom Layer w0.18: oled.20 36.393,5.656 36.775,6.039 43.701,6.039 43.755,5.985 46.717,5.985 46.75,6.018 2.1
Net11_2: 11.2 MSM26.7 | length 2.5
  Top Layer w0.3: v2(11.43,5.588) 11.446,5.604 MSM26.7
  Bottom Layer w0.3: 11.2 11.112,5.588 v2(11.43,5.588)
Net14_2: 14.2 C43.1 MIC.1 | length 8.9
  Bottom Layer w0.5: MIC.1 36.068,37.211 36.83,36.449 C43.1 14.2
Net15_1: 15.1 C44.1 MIC.2 | length 22.6
  Top Layer w0.5: MIC.2@33.909,37.211 34.671,36.449 35.433,36.449 v4(35.941,35.941)
  Bottom Layer w0.4: v1(39.433,23.749) 42.291,23.749 42.735,23.304 15.1
  Bottom Layer w0.5: v4(35.941,35.941) 35.941,28.555 35.491,28.105 35.491,25.215 36.068,24.638 38.989,24.638 39.433,24.194 v1(39.433,23.749)
Net15_2: 15.2 C45.1 C46.1 JP2.12 | length 14.1
  Bottom Layer w0.2: 15.2 44.958,21.653 44.958,17.644 44.41,17.095 JP2.12
  Bottom Layer w0.4: C46.1 40.069,25.146 C45.1 44.133,24.575 15.2
Net16_1: 16.1 17.1 C48.1 JP2.21 | length 5
  Bottom Layer w0.19: v1(41.656,11.684) 42.142,11.198 45.172,11.198 45.19,11.181 46.477,11.181 v1(46.482,11.176)
Net16_2: 16.2 C47.1 | length 1.9
  Top Layer w0.3: 16.2 C47.1
Net17_2: 17.2 C48.2 JP2.22 | length 2.2
  Top Layer w0.19: v1(46.101,10.668) 46.101,10.477 C48.2
  Bottom Layer w0.19: JP2.22 46.062,10.707 v1(46.101,10.668)
Net*1_2: *1.2 RAY.3 | length 2
  Top Layer w0.19: v1(62.992,28.448) 64.197,28.448 *1.2
  Bottom Layer w0.19: RAY.3 62.42,28.448 v1(62.992,28.448)
Net*2_1: *2.1 RAY.11 | length 3
  Top Layer w0.4: *2.1 44.736,24.003 v1(46.354,22.385)
Net*3_2: *3.2 RAY.10 | length 3.2
  Top Layer w0.4: *3.2 44.263,22.477 v1(46.356,20.385)
NetASM1117-3.3V_4: ASM1117-3.3V.4 C4.1 C5.1 C6.1
  other v5: 1.778,5.08
NetASM1117_5.0V_4: ASM1117_5.0V.4 C1.1 C2.1 C3.1
  other v2: 1.524,29.083
  other v4: 1.524,26.924 1.524,31.369
Netbeep_1: beep.1 Q1.1 | length 4.1
  Top Layer w0.6: beep.1 21.765,29.845 Q1.1
NetC7_2: C7.2 CP2102.6 | length 9.5
  Bottom Layer w0.17: C7.2 1.202,11.307 1.202,15.422 1.483,15.703 4.4,15.703 5.135,16.438 CP2102.6
NetC8_1: C8.1 oled.2 | length 8.4
  Bottom Layer w0.19: C8.1 17.59,3.365 18.256,4.032 19.71,4.032 20.894,2.848 23.408,2.848 23.793,3.234 oled.2
NetC8_2: C8.2 oled.3 | length 7.6
  Bottom Layer w0.19: C8.2 19.812,3.302 20.71,2.404 23.994,2.404 24.493,2.903 oled.3
NetC9_1: C9.1 oled.4 | length 10
  Bottom Layer w0.19: C9.1 18.479,2.286 20.2,2.286 20.526,1.96 24.178,1.96 25.193,2.975 oled.4
NetC9_2: C9.2 oled.5 | length 9
  Bottom Layer w0.19: C9.2 24.257,1.397 25.893,3.033 oled.5
NetC12_1: C12.1 oled.27 | length 3
  Bottom Layer w0.18: oled.27 41.293,2.649 41.91,2.032 v3(42.291,2.032)
NetC13_1: C13.1 C14.1 oled.28 | length 11.4
  Bottom Layer w0.18: oled.28 41.988,3.097 42.291,2.794 46.164,2.794 C14.1
  Bottom Layer w0.4: C14.1 47.053,2.222 47.752,2.921 49.657,2.921 50.355,2.222 C13.1
NetC31_2: C31.2 KEY1.2 R1.1 U1.14 | length 16.4
  Top Layer w0.19: KEY1.2@30.362,23.082 34.662,23.082 36.862,23.082 v1(37.973,21.971)
  Bottom Layer w0.19: U1.14 36.533,18.753 37.973,20.193 R1.1@37.973,20.359 ; v1(37.973,21.971) R1.1@37.973,20.359 ; R1.1 R1.1@37.973,20.359
NetC32_1: C32.1 U1.73 | length 2.3
  Bottom Layer w0.19: C32.1 14.667,24.253 U1.73 U1.73
NetC33_2: C33.2 U1.49 | length 3.1
  Bottom Layer w0.19: C33.2 18.287,8.762 18.669,9.144 18.669,10.259 18.631,10.297 U1.49 U1.49 U1.49
NetC47_2: C47.2 JP2.20 | length 1.6
  Bottom Layer w0.19: v1(43.561,11.747) 43.576,11.733 45.154,11.733 JP2.20
NetC49_1: C49.1 L2.2
  other v2: 40.386,18.161
NetIIC_2: IIC.2 oled.11 SPI.1 | length 21.8
  Top Layer w0.2: v2(17.462,5.207) 18.098,5.842 23.488,5.842 25.339,3.991 28.902,3.991 v2(30.093,2.8)
  Bottom Layer w0.3: SPI.1 15.494,1.27 16.002,1.778 16.002,4.318 16.891,5.207 v2(17.462,5.207) ; v2(30.093,2.8) oled.11
NetLED2_4: LED2.4 RES_RGB_R.2
  other v1: 34.798,34.036
NetLED2_5: LED2.5 RES_RGB_G.2
  other v1: 34.861,32.258
NetLED2_6: LED2.6 RES_RGB_B.2
  other v1: 34.925,30.48
NetP_LED_1: P_LED.1 R-power.2 | length 2.2
  Bottom Layer w0.254: P_LED.1 R-power.2
NetQ1_2: Q1.2 R_BEEP.1 | length 3.5
  Top Layer w0.4: Q1.2 26.647,32.827 R_BEEP.1
NetU1_12: U1.12 X1.2 | length 6
  Bottom Layer w0.19: U1.12 34.104,19.753 34.671,20.32 34.671,22.098 34.925,22.352 X1.2
NetU1_13: U1.13 X1.1 | length 4.1
  Bottom Layer w0.19: U1.13 35.509,19.253 X1.1
OLED_CS: oled.13 U1.48 | length 18.7
  Bottom Layer w0.2: U1.48 19.177,6.731 19.812,6.096
  Bottom Layer w0.254: 19.812,6.096 31.329,6.096 31.493,5.932 oled.13
OLED_D0: 3.1 oled.18 U1.45 | length 34.5
  Top Layer w0.18: v3(34.993,2.794) 34.993,3.751 35.052,3.81 v3(45.974,3.81)
  Bottom Layer w0.18: v3(34.993,2.794) oled.18 ; v3(45.974,3.81) 3.1
  Bottom Layer w0.2: U1.45 20.63,8.199 21.209,7.62
  Bottom Layer w0.254: 21.209,7.62 32.171,7.62 33.715,6.076 34.626,6.076 34.993,5.709 oled.18
OLED_D1: 2.2 4.1 oled.19 U1.44 | length 35.9
  Top Layer w0.18: v3(35.941,6.858) v3(47.307,6.858)
  Bottom Layer w0.18: oled.19 35.687,4.451 35.687,5.733 35.687,6.604 v3(35.941,6.858) ; v3(47.307,6.858) 2.2
  Bottom Layer w0.2: U1.44 21.13,8.636 21.638,8.128 21.844,8.128
  Bottom Layer w0.254: 21.844,8.128 32.381,8.128 33.926,6.584 34.837,6.584 35.687,5.733
  Bottom Layer w0.4: 2.2 4.1
OLED_DC: oled.15 U1.46 | length 18.8
  Bottom Layer w0.2: U1.46 20.13,7.683 20.701,7.112
  Bottom Layer w0.254: 20.701,7.112 31.96,7.112 32.749,6.323 32.749,4.589 oled.15
OLED_RES: oled.14 U1.47 | length 18.8
  Bottom Layer w0.2: 19.64,7.366 U1.47@19.64,11.328
  Bottom Layer w0.254: 19.659,7.366 20.32,6.705 20.32,6.604 31.75,6.604 32.193,6.161 oled.14
RGB_B: LED2.3 U1.98 | length 4
  Bottom Layer w0.18: U1.98 29.13,29.765 v1(30.099,30.734)
RGB_G: LED2.2 U1.97 | length 5.7
  Bottom Layer w0.18: U1.97 28.636,27.184 28.636,29.899 30.099,31.362 v1(30.099,32.258)
RGB_R: LED2.1 U1.96 | length 7.6
  Bottom Layer w0.18: U1.96 28.136,27.184 28.136,30.013 29.665,31.542 29.665,32.064 29.655,32.074 29.655,32.442 30.099,32.886 v1(30.099,33.909)
SDIO_CK: external.2 U1.80 | length 67.6
  Top Layer w0.2: v4(20.701,25.146) 20.701,26.543 21.317,27.159 34.539,27.159 34.558,27.178 40.894,27.178 41.783,28.067 60.706,28.067 61.903,26.87 61.903,7.82 63.326,6.397 external.2
  Bottom Layer w0.2: U1.80 20.13,25.717 v4(20.701,25.146)
SDIO_CMD: external.1 U1.83 | length 67.1
  Top Layer w0.2: v4(21.63,25.146) 21.63,26.329 22.006,26.705 41.31,26.705 42.037,27.432 59.944,27.432 61.449,25.927 61.449,7.632 61.468,7.613 61.468,6.26 external.1
  Bottom Layer w0.2: v4(21.63,25.146) U1.83
SDIO_D0: external.7 U1.65 | length 100.4
  Top Layer w0.2: v4(18.034,19.812) 16.891,20.955 16.891,22.86 12.319,27.432 12.319,32.385 14.478,34.544 23.596,34.544 29.003,39.951 35.233,39.951 40.894,34.29 58.039,34.29 v4(59.245,33.084)
  Bottom Layer w0.2: U1.65 17.593,20.253 v4(18.034,19.812) ; v4(59.245,33.084) 59.309,33.02 59.309,18.838 58.501,18.03 58.501,15.737 59.309,14.93 59.309,8.763 61.729,6.343 external.7
SDIO_D1: external.8 U1.66 | length 99.5
  Top Layer w0.2: v4(18.034,21.209) 18.034,22.733 12.954,27.813 12.954,32.258 14.732,34.036 24.003,34.036 29.464,39.497 34.925,39.497 40.894,33.528 v4(56.515,33.528)
  Bottom Layer w0.2: U1.66 17.578,20.753 v4(18.034,21.209) ; 56.504,18.032 56.504,15.739 56.748,15.494 58.047,15.494 58.293,15.248 58.293,6.604 61.054,3.843 external.8 ; 56.515,18.032 56.515,33.401 56.642,33.528 v4(56.515,33.528)
SDIO_D2: external.4 U1.78 | length 66.4
  Top Layer w0.2: v4(18.669,25.146) 18.669,26.797 19.939,28.067 34.163,28.067 34.463,28.367 39.924,28.367 40.894,29.337 61.087,29.337 63.831,26.593 external.4
  Bottom Layer w0.2: v4(18.669,25.146) 19.13,25.607 U1.78
SDIO_D3: external.3 U1.79 | length 66.8
  Top Layer w0.2: v4(19.685,25.146) 19.685,26.797 20.501,27.613 34.351,27.613 34.505,27.767 40.467,27.767 41.402,28.702 60.96,28.702 62.357,27.305 62.357,10.371 external.3
  Bottom Layer w0.2: U1.79 19.63,25.201 v4(19.685,25.146)
SWCLK_PA14: STLINK.3 U1.76 | length 11.4
  Bottom Layer w0.2: U1.76@18.126,27.178 18.126,33.182
  Bottom Layer w0.3: STLINK.3 14.605,33.274 14.998,33.667 17.641,33.667 18.126,33.182
SWDIO_PA13: STLINK.4 U1.72 | length 12.5
  Bottom Layer w0.18: 14.609,23.753 U1.72 U1.72@16.256,23.753
  Bottom Layer w0.2: STLINK.4 11.684,31.369 11.684,24.13 12.061,23.753 14.609,23.753
USART1_RX: CP2102.26 U1.69 | length 14.4
  Bottom Layer w0.17: CP2102.26 3.704,19.939 3.704,20.687 5.777,22.759 13.944,22.759 14.478,22.225 15.16,22.225 15.16,22.242 16.194,22.242 U1.69
USART1_TX: CP2102.25 U1.68 | length 16.5
  Bottom Layer w0.17: CP2102.25 3.204,19.939 3.204,19.314 3.343,19.175 4.882,19.175 5.207,19.5 5.207,21.59 5.952,22.335 13.768,22.335 14.339,21.764 16.194,21.764 U1.68
USART2_RX: RAY.16 U1.87 | length 30.3
  Top Layer w0.2: v1(23.622,28.702) 23.622,28.822 23.756,28.956 23.775,28.937 23.813,28.975 39.368,28.975 v1(39.423,29.03)
  Bottom Layer w0.2: v1(23.622,28.702) 23.63,28.694 U1.87 ; v1@39.368,28.975 v1(39.423,29.03) 39.593,29.03 40.064,29.502 40.064,29.516 40.479,29.931 44.357,29.931 44.824,29.464 47.435,29.464 47.752,29.781 47.752,31.75 47.117,32.385 RAY.16
USART2_TX: RAY.15 U1.86 | length 25.8
  Top Layer w0.2: v1(23.114,28.702) 23.114,28.956 23.749,29.591 39.37,29.591 v1(39.497,29.718)
  Bottom Layer w0.2: v1(23.114,28.702) 23.13,28.686 U1.86 ; v1(39.497,29.718) 39.624,29.718 40.291,30.385 RAY.15 RAY.15@46.196,30.226
VCC: ASM1117_5.0V.3 FUSE.2
  other v5: 7.62,10.287
VCC_IN: FUSE.1 TYPR_C.A4B9 TYPR_C.B4A9
  other v5: 3.937,10.287
VREF: C52.1 C53.1 JP2.18 | length 8.6
  Bottom Layer w0.18: JP2.18 46.489,12.707 46.736,12.954 46.736,13.144 C53.1
  Bottom Layer w0.4: C53.1 47.561,13.977 48.389,14.805 50.981,14.805 51.308,14.478 C52.1
VREF+: C34.2 R4.2 U1.21 U2.1 U2.2 | length 13.2
  Top Layer w0.4: R4.2 24.472,15.406 24.892,14.986 ; C34.2 24.892,14.295 24.892,14.986 ; v1(27.366,17.177) U2.1 24.892,16.603 24.892,14.986
  Bottom Layer w0.19: v1(27.366,17.177) 28.321,16.222 28.321,15.621 28.69,15.252 U1.21 U1.21
pads on no net: CP2102.1 CP2102.2 CP2102.10 CP2102.11 CP2102.12 CP2102.13 CP2102.14 CP2102.15 CP2102.16 CP2102.17 CP2102.18 CP2102.19 CP2102.20 CP2102.21 CP2102.22 CP2102.23 CP2102.24 CP2102.27 CP2102.28 CP2102.29 external.5 external.6 J2.1 JP2.2 JP2.3 JP2.4 JP2.5 JP2.6 JP2.11 JP2.13 JP2.14 JP2.15 JP2.16 JP2.27 JP2.28 JP2.29 JP2.30 JP2.34 JP2.35 JP2.36 JP2.37 JP2.38 JP2.44 JP2.45 key. MSM26.2 RAY.2 RAY.4 RAY.5 RAY.6 RAY.7 RAY.12 RAY.13 RAY.14 RAY.17 RAY.18 RAY.19 RAY.20 RAY.21 RAY.22 TYPR_C. TYPR_C.A8 TYPR_C.B5 U1.2 U1.3 U1.4 U1.5 U1.7 U1.8 U1.9 U1.26 U1.29 U1.30 U1.31 U1.32 U1.33 U1.34 U1.35 U1.36 U1.38 U1.53 U1.55 U1.56 U1.57 U1.58 U1.59 U1.60 U1.61 U1.62 U1.63 U1.64 U1.67 U1.70 U1.71 U1.77 U1.81 U1.82 U1.84 U1.85 U1.88 U1.89 U1.90 U1.91 U1.92 U1.95
copper on no net:
  other v2: 51.181,21.463 52.324,21.463 53.34,21.463 54.229,21.463 51.181,22.352 52.324,22.352 53.34,22.352 54.229,22.352 51.181,23.495 52.324,23.495 53.34,23.495 54.229,23.495 51.181,24.638 52.324,24.638 53.34,24.638 54.229,24.638

## Polygon pours and split planes (outlines as drawn)
GND on Bottom Layer "Top Layer-No Net" (solid, remove dead copper, pour order 10): -1.651,41.656 66.04,41.656 66.04,-2.413 65.024,-3.429 64.643,-3.048 -1.397,-3.048
GND on Top Layer "Top Layer-No Net" (solid, remove dead copper, pour order 12): -1.27,42.164 66.167,42.164 65.913,41.91 65.913,-3.556 -1.016,-3.556 -1.524,-3.048

## Keep-outs
Keep-Out Layer:
  lines w0.254: -0.005,2.032 ccw(c1.778,2.032) 1.778,0.249 ; -0.005,33.274 cw(c1.778,33.274) 1.778,35.057 ; 0,2.032 0,33.274 ; 1.778,0.254 63.119,0.254 ccw(c63.246,2.032) 65.011,2.284 ; 1.778,35.052 23.114,35.052 27.813,39.751 cw(c29.464,38.481) 29.464,40.564 35.032,40.564 ; 35.088,40.508 cw(c35.088,38.425) 36.639,39.815 41.402,35.052 62.994,35.052 ; 62.994,35.039 cw(c63.246,33.274) 65.024,33.147 65.024,2.284

## Other copper
Top Layer:
  rectangle net 5V: 5.207,6.858 9.271,8.001
  rectangle net 5V: 4.191,12.573 5.334,30.099
  rectangle net 5V: 2.921,29.083 9.144,30.099
  rectangle net VCC_IN: 8.763,14.097 9.271,19.812
  rectangle net VCC_IN: 6.858,19.304 9.271,19.812
  rectangle net VCC_IN: 3.302,9.652 4.572,11.938
  rectangle net VCC_IN: 3.302,11.176 9.144,11.938
  rectangle net VCC_IN: 8.636,11.176 9.271,15.113
  rectangle net VCC_IN: 6.858,14.478 9.144,15.113
  rectangle net VCC: 6.858,9.779 10.16,10.795
  rectangle net VCC: 9.525,9.779 10.16,32.385
  rectangle net VCC: 7.62,31.496 10.16,32.385
  rectangle net Net16_1: 46.355,10.795 49.149,11.43
  rectangle net Net17_2: 46.355,9.271 49.149,10.033
Bottom Layer:
  rectangle net 5V: 5.969,29.083 8.255,30.099
  rectangle net 5V: 6.858,29.083 8.255,34.29
  rectangle net NetASM1117-3.3V_4: 1.016,2.032 2.54,8.001
  rectangle net 5V: 5.334,6.731 6.477,12.065
  rectangle net 5V: 4.572,11.303 6.477,12.065
  rectangle net 5V: 4.191,11.303 5.334,13.462
  rectangle net NetASM1117_5.0V_4: 0.635,26.162 2.413,32.004

## Silkscreen, mask and mechanical layers (free items; w line width, h text height)
Top Overlay:
  drawing of 505 lines, arcs and shapes, not listed
  text "SPEAKER" at 51.689,29.718 h1.5
  text "RAYMOND" at 9.525,13.462 h1.5
  text "D2" at 63.373,12.319 h0.6
  text "D3" at 63.373,9.779 h0.6
  text "CK" at 63.373,7.239 h0.6
  text "CMD" at 62.992,4.736 h0.6
Bottom Overlay:
  text "SWDIO" at 12.065,34.163 h0.6
  text "SWCLK" at 15.875,34.163 h0.6
  text "GND" at 18.034,34.163 h0.6
  text "VCC_3" at 22.098,34.163 h0.6
  text "ESP8266" at 59.182,26.416 h1.5
  text "D0" at 62.484,6.731 h0.6 r90
  text "D1" at 62.484,4.318 h0.6 r90
Bottom Paste:
  text "Version 1.0" at 60.724,1.266 h3 r270
Bottom Solder:
  text "Version 1.0" at 60.674,1.341 h3 r270